# EAGLE board boot_rig_atmega (EAGLE 7.7.0)
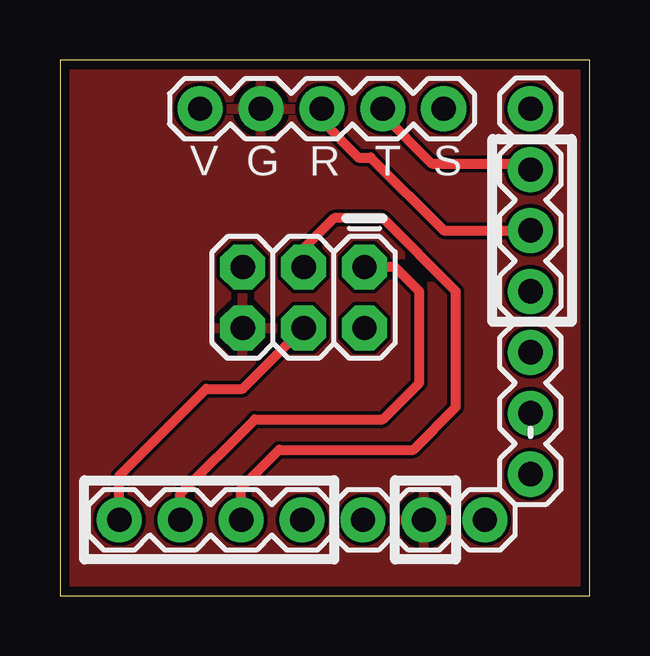
[diagram p0: board, top side]
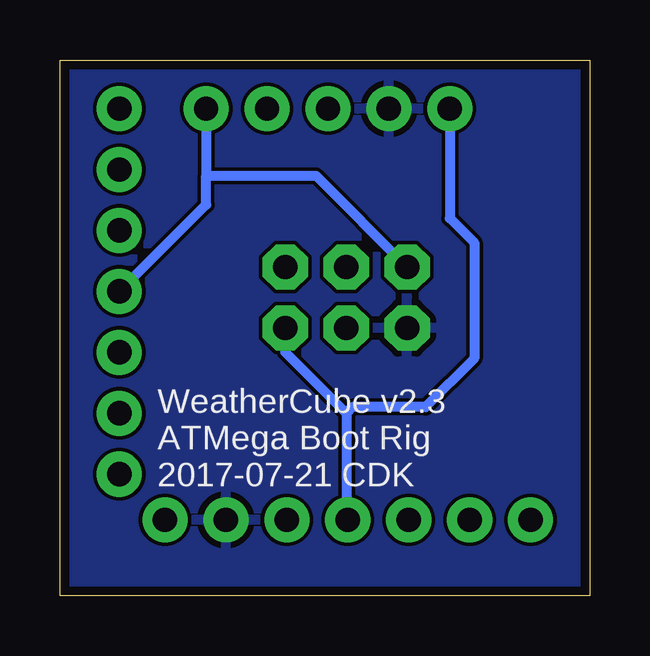
[diagram p1: board, bottom side, seen from below]

Size 22.1 x 22.35 mm. Coordinates in mm from the lower left corner, seen from the top.
Outline: 0,0 22.1,0 22.1,22.35 0,22.35 0,0
Copper layers (1*16): Top 0.0356mm / dielectric 1.5011mm / Bottom 0.0356mm
Design rules "default *": minimum track width 6mil, minimum drill 13mil, track to track 6mil, track to pad 6mil, pad to pad 6mil, via to via 6mil, smd to smd 6mil, copper to edge 15mil, drill to drill 6mil, minimum pad ring 7mil, minimum via ring 7mil, stop-mask expansion 4mil, vias tented up to drill 15mil, thermal gap 10mil

## Footprints (pad centres in the part's own frame; a part is rotated, then mirrored left to right if it is on the bottom)
2X3 = drill 1.016 pad 1.88 octagon: 1 0,0; 2 0,2.54; 3 2.54,0; 4 2.54,2.54; 5 5.08,0; 6 5.08,2.54
1X05 = drill 1.016 pad 1.88: 1 0,0; 2 2.54,0; 3 5.08,0; 4 7.62,0; 5 10.16,0
1X07 = drill 1.016 pad 1.88: 1 0,0; 2 2.54,0; 3 5.08,0; 4 7.62,0; 5 10.16,0; 6 12.7,0; 7 15.24,0

## Placement (x,y rotation side)
FRAME1  FRAME-LETTER  [CREATIVE_COMMONS]  3.3,-11.18 0 top  (outside the outline)
JP1  AVR_SPI_PRG_6PTH  [2X3]  12.7,13.72 180 top
JP3  [1X05]  5.84,20.32 0 top
JP9  [1X07]  19.62,20.32 270 top
JP10  [1X07]  17.72,3.17 180 top

## Library data of the parts
FRAME1 = SparkFun-Aesthetics
JP1 JP3 = SparkFun-Connectors
JP9 JP10 = SparkFun

## Nets
5V: JP1.2 JP3.1 JP10.4
D11: JP1.4 JP10.7
D12: JP1.1 JP10.6
D13: JP1.3 JP10.5
GND: JP1.6 JP3.2 JP10.2
RST: JP1.5 JP3.5 JP9.4
RX: JP3.3 JP9.3
TX: JP3.4 JP9.2

## Tracks (layer width: path | path; a pad name or v marks a point on that pad's centre or on a via)
5V
  Bottom 0.406: JP1.2 12.7,10.16 10.16,7.62 | 10.16,7.62 10.16,3.24 JP10.4 | JP3.1 5.84,15.75 4.83,14.73 4.83,9.91 6.86,7.87 9.91,7.87 10.16,7.62
D11
  Top 0.406: JP10.7 2.48,5.02 6.1,8.64 7.62,8.64 JP1.4
D12
  Top 0.406: JP10.6 5.02,4.25 8.13,7.37 13.46,7.37 14.99,8.89 14.99,12.7 13.97,13.72 JP1.1
D13
  Top 0.406: JP10.5 7.56,4.51 9.14,6.1 14.73,6.1 16.51,7.87 16.51,12.7 13.46,15.75 11.43,15.75 10.16,14.48 JP1.3
GND
  pour Bottom: -2.79,50.8 69.85,51.56 69.6,-5.08 -2.79,-5.08
  pour Top: -4.57,51.05 68.07,51.82 67.82,-4.83 -4.57,-4.83
RST
  Bottom 0.406: JP3.5 16,17.53 | JP9.4 16,16.32 16,17.53 | 16,17.53 11.43,17.53 JP1.5
RX
  Top 0.406: JP3.3 10.92,19.81 12.45,18.29 12.95,18.29 16,15.24 JP9.3
TX
  Top 0.406: JP3.4 13.46,20.07 15.49,18.03 19.37,18.03 JP9.2

## Text on the board
tNames: V | G | R | T | S | Chris Kelley / BaltimoreOpenAir
bNames: WeatherCube v2.3 / ATMega Boot Rig / 2017-07-21 CDK